# Altium PCB PCB1_r2.PcbDoc (part 3 of 3)
Units mm, origin at the board's own origin, x right, y up, seen from the top; angles counter-clockwise.
Board outline 305 x 172.5 mm, 4 copper layers (Top Layer, GND, VDD, Bottom Layer), stack 1.585 mm thick; 217 components, 137 nets, 764 pads, 352 vias.
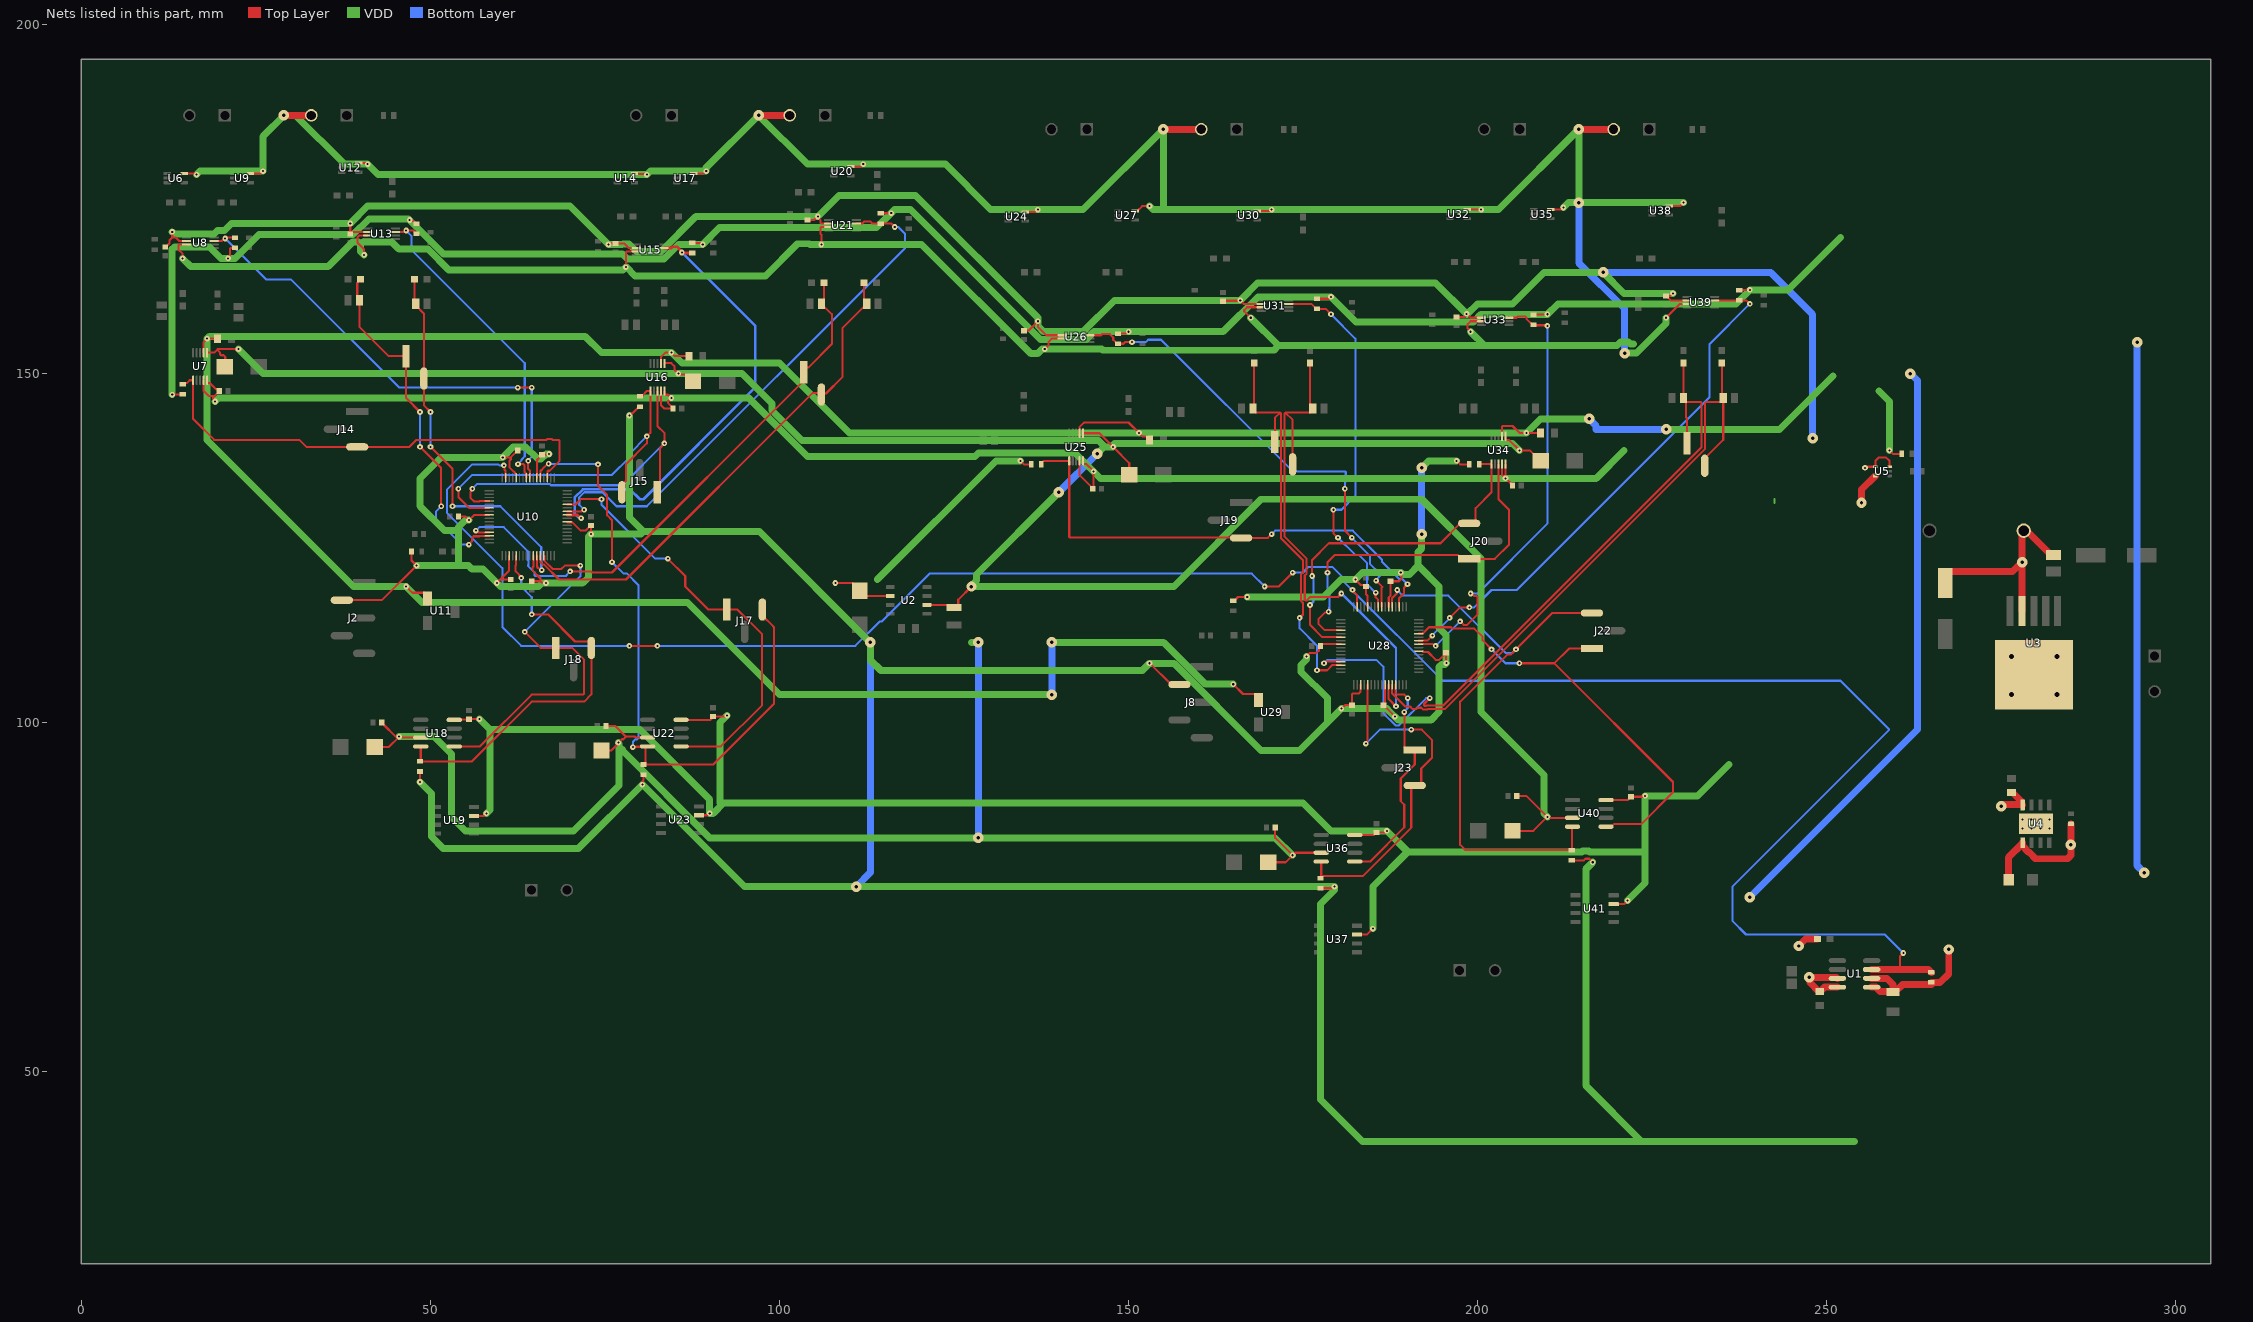
[diagram p5: the nets of this part, all layers, seen from the top]

## Via types
v1: diameter 0.8, hole 0.3, Top Layer to Bottom Layer, 291 vias
v2: diameter 1.5, hole 0.5, Top Layer to Bottom Layer, 48 vias
v3: diameter 0.5, hole 0.3, Top Layer to Bottom Layer, 8 vias
v4: diameter 1.27, hole 0.711, Top Layer to Bottom Layer, 4 vias
v5: diameter 0.83, hole 0.3, Top Layer to Bottom Layer, 1 vias

## Nets (pads, with @x,y where several pads share a name; then routed paths per layer and width w, separated by ;. In a path a pad name is that pad's centre, name@x,y a point inside that pad or via, vN(x,y) a via of type N, cw(c..) or ccw(c..) an arc to the next point about the centre after c; other vN are vias at no path point) (continued)
SCLK2_S2: J15.1 U10.4 U16.8 | length 50
  Top Layer w0.3: v1(56,133.5) 56,133.365 55.754,133.119 55.754,132.167 56.225,131.696 57.034,131.696 57.088,131.75 U10.4@58.425,131.75 ; J15.1@82.5,133 82.875,133.375 82.875,139.321 83.5,139.946 83.5,141.5 82.5,142.5 U16.8@82.5,147.5
  Bottom Layer w0.3: v1(56,133.5) 56.696,134.196 67.068,134.196 67.264,134 77.5,134 v1(83.5,140)
SCLK2_S4: J20.1 U28.4 U34.8 | length 53.2
  Top Layer w0.3: v1(178.5,121.5) 178.5,123 179.5,124 196.961,124 196.993,124.031 197.154,124.031 197.725,123.46 J20.1@198.8,123.46 202.46,123.46 204.5,125.5 204.5,130.5 203,132 U34.8@203,137.05 ; v1(178.655,115.888) 178.56,115.792 178.155,115.792 177.196,114.833 177.196,114.167 178.113,113.25 U28.4@180.425,113.25
  Bottom Layer w0.3: v1(178.5,121.5) 178.5,118.748 178.816,118.432 178.816,116.517 178.751,116.452 178.751,115.984 v1(178.655,115.888)
SCLK3_S1: J18.1 U10.29 U18.5 | length 56.3
  Top Layer w0.3: U18.5@53.4,96.595 53.405,96.595 53.5,96.5 53.595,96.595 57.095,96.595 64.5,104 71.886,104 72,104.114 72,109 70.3,110.7 J18.1@67.96,110.7 65.8,110.7 v1(63.5,113) ; U10.29@66.25,123.925 66.294,123.881 66.294,123.206 67.5,122 68.75,122 69.25,122.5 v1(71.471,122.5)
  Bottom Layer w0.3: v1(63.5,113) 71.471,120.971 v1(71.471,122.5)
SCLK3_S3: J23.1 U28.29 U36.5 | length 33.4
  Top Layer w0.3: U36.5@182.4,80.095 184.595,80.095 189.5,85 189.5,88.25 189,88.75 189,92 191,94 J23.1@191,96.08 189.925,96.08 189.55,96.455 189.55,101.45 v1(189.5,101.5) ; U28.29@188.25,105.425 188.25,104.25 188.5,104 189.5,104 v1(190,103.5)
  Bottom Layer w0.3: v1(189.5,101.5) 189.5,101.595 190,102.095 v1(190,103.5)
SCLK4_S2: J17.1 U10.44 U22.5 | length 61.8
  Top Layer w0.3: U10.44@69.575,131.25 70.775,131.25 71.579,132.054 73.92,132.054 73.973,132 v1(74.5,132) ; v1(84,123.5) 86.496,121.004 86.496,119.504 89.8,116.2 J17.1@92.46,116.2 93.955,116.2 97.5,112.655 97.5,102.5 91.595,96.595 U22.5@85.9,96.595
  Bottom Layer w0.3: v1(74.5,132) 74.5,131.187 82.187,123.5 v1(84,123.5)
SCLK4_S4: J22.1 U28.44 U40.5 | length 65.7
  Top Layer w0.3: U28.44@191.575,112.75 192.059,112.75 192.214,112.905 192.29,112.905 192.492,113.107 192.492,113.12 193.035,113.664 196.186,113.664 196.38,113.47 199.53,113.47 200.717,112.283 200.717,111.783 v1(202,110.5) ; v1(206,108.5) 211,108.5 ; J22.1@216.384,110.625 213.125,110.625 211,108.5 ; U40.5@218.4,85.095 219.2,85.095 219.605,85.5 223.5,85.5 228,90 228,91.5 211,108.5
  Bottom Layer w0.3: v1(202,110.5) 204,108.5 v1(206,108.5)
Thermal: U3.6 U4.9
  other v3: 278.05,84.85 279.35,84.85 280.65,84.85 281.95,84.85 278.05,86.15 279.35,86.15 280.65,86.15 281.95,86.15
  other v4: 276.5,104 283,104 276.5,109.5 283,109.5
VCC_1.8V: C3.1 C20.1 C29.1 C51.1 C60.1 R3.2 R4.2 U1.7 U1.8 U7.2 U11.2 U16.2 U25.2 U29.2 U34.2 | length 577.1
  Top Layer w0.3: U7.2@17.5,153 17.5,154.5 v1(18,155) C20.1@19.5,155 ; v1(46.5,119.5) 47.4,118.6 49.1,118.6 49.6,118.1 U11.2@49.6,117.75 ; U16.2@83,151.45 83,152.364 83.636,153 v1(84.5,153) 85,152.5 C29.1@87,152.5 ; U25.2@143,141.45 143,142.364 143.318,142.682 ; 143.319,142.682 143.637,143 150,143 v1(151.5,141.5) 152.025,140.975 152.65,140.975 153,140.625 C51.1@153,140.5 ; v1(165,105.5) 166.4,104.1 168.1,104.1 168.6,103.6 U29.2@168.6,103.25 ; U34.2@203.5,141 203.5,142.386 203.614,142.5 205,142.5 206,141.5 v1(207,141.5) C60.1@209,141.5 ; v1(259,139) 259.5,138.5 R4.2@260.775,138.5
  Top Layer w1: v2(246,68) 247,69 R3.2@248.7,69 ; U1.8@251.55,62.095 249.711,62.095 249.125,61.509 249.125,61.5 C3.1@249,61.5 248.875,61.5 247.596,62.779 247.596,63.404 v2(247.5,63.5) 251.415,63.5 U1.7@251.55,63.365
  VDD w1: v2(139,111.5) 155.04,111.5 161.04,105.5 v1(165,105.5) ; v2(139.004,104) 100,104 86.808,117.192 48.808,117.192 v1(46.5,119.5) 38.96,119.5 18,140.46 v1(18,155) 18.346,155.346 72.154,155.346 74.5,153 v1(84.5,153) 86,151.5 100,151.5 110,141.5 v1(151.5,141.5) v1(207,141.5) 209,143.5 v2(216,143.5) ; v2(227,142) 243.274,142 250.94,149.666 ; 257.5,147.5 259,146 v1(259,139)
  Bottom Layer w1: v2(139,111.5) 139.024,111.476 139.024,111.024 139.004,111.004 v2(139.004,104) ; v2(216,143.5) 217,142.5 217,142 v2(227,142) ; v2(239,75) 263.004,99.004 263.004,148.996 v2(262,150)
VCC_1V: C18.1 C23.1 C26.1 C35.1 C48.1 C54.1 C57.1 C66.1 U5.3 U5.4 U8.2 U13.2 U15.2 U21.2 U26.2 U31.2 U33.2 U39.2 | length 334.8
  Top Layer w0.3: C18.1@12,168.125 12.05,168.125 12.638,168.713 12.638,169.138 13,169.5 ; v1(13,170.304) 13,169.5 ; U8.2@15.05,169 14,169 13.5,169.5 13,169.5 ; v1(38.5,171.5) C23.1@38.5,170 38.55,170 38.829,170.279 U13.2@41.021,170.279 ; v1(75.5,168.5) 75.625,168.625 C26.1@76.5,168.625 77.8,168.625 78.425,168 U15.2@79.5,168 ; C35.1@104,172 105,172 v1(105.5,172.5) 105.5,172.365 105.871,171.994 105.871,171.629 106,171.5 U21.2@107.05,171.5 ; C48.1@135,156.125 135.039,156.164 135.664,156.164 v1(137,157.5) 137,156.726 138.226,155.5 U26.2@140.5,155.5 ; C54.1@163.5,160.375 163.562,160.437 165.938,160.437 v1(166,160.5) 166.5,160 U31.2@169,160 ; C57.1@197,158.125 198.125,158.125 198.435,158.435 v1(198.435,158.565) ; v1@198.5,158.5 199,158 U33.2@200.55,158 ; C66.1@227,161.125 C66.1@227.05,161.125 ; v1(228,161.5) 227.625,161.125 C66.1@227.05,161.125 ; U39.2@230,160.5 227.675,160.5 C66.1@227.05,161.125 ; v1(255.5,136.5) 255.554,136.5 255.704,136.65 U5.4@256.975,136.65 257,136.675 257,137.5 257.5,138 258.5,138 259.025,137.475 U5.3@259.025,136.65
  VDD w1: v1(13,170.304) 13.304,170 19,170 19.504,170.504 20.504,170.504 21.5,171.5 v1(38.5,171.5) 41,174 70,174 v1(75.5,168.5) 77.464,168.5 77.549,168.585 78.451,168.585 79.089,167.947 79.089,167.911 79.5,167.5 83,167.5 88,172.5 v1(105.5,172.5) 108.5,175.5 119.5,175.5 137,158 137,156.819 137.819,156 143.5,156 148,160.5 v1(166,160.5) 168.5,163 194,163 198.5,158.5 200,160 205,160 209.5,164.5 v2(218,164.5) 221,161.5 v1(228,161.5)
  Bottom Layer w1: v2(218,164.5) 242,164.5 248,158.5 v2(248,140.716)
VCC_3.3V: C5.2 C6.2 C7.1 C10.2 C11.2 C12.2 C13.2 C14.2 C15.2 C43.2 C44.2 C45.2 C46.2 C47.2 C49.2 J2.2 J8.2 R1.2 R2.2 R6.2 R12.2 R14.2 R22.2 R24.2 R30.2 R32.2 R33.2 R38.2 R42.2 R48.2 R50.2 R58.2 R60.2 R66.2 R68.2 R69.2 R74.2 U1.1 U1.2 U2.2 U4.1 U10.8 U10.19 U10.26 U10.39 U10.54 U10.60 U28.8 U28.19 U28.26 U28.39 U28.54 U28.60 | length 1206.4
  Top Layer w0.3: v1(13,147) 13.025,147.025 14.475,147.025 R12.2@14.5,147.05 ; v1(21,166.5) 21,166.635 21.304,166.939 21.304,167.886 21.418,168 R6.2@22,168 ; J2.2@37.3,117.54 43.04,117.54 v1(48,122.5) 47.275,123.225 R24.2@47.275,124.5 ; v1(47,172) 47.038,171.962 47.413,171.962 47.875,171.5 R14.2@48,171.5 ; v1(48.5,91.5) R32.2@48.5,93 ; C15.2@54,129.5 55,129.5 v1(55.5,129) 56.25,129.75 U10.8@58.425,129.75 ; v1(59.5,120) 60.069,120.569 61.25,121.75 U10.19@61.25,123.925 ; 60.137,120.5 C13.2@61.5,120.5 ; v1(60.346,138.004) 60.35,138 61.5,138 ; U10.60@62.206,135.603 62.095,135.714 62.095,135.79 61.893,135.992 61.88,135.992 61.336,136.535 61.336,137.523 61.5,137.687 61.5,138 ; C12.2@62.5,139 61.5,138 ; C14.2@64.5,120.25 65.75,120.25 ; U10.26@64.75,123.925 64.75,122.359 64.6,122.209 64.6,121.804 65.75,120.654 65.75,120.25 ; U10.54@65.25,135.075 65.25,137.625 65.725,138.1 65.725,138.15 65.95,138.375 C11.2@66,138.375 66.062,138.437 66.813,138.437 v5@66.875,138.375 ; v1(66.54,120) 66.444,120.096 65.904,120.096 65.75,120.25 ; v5@66.875,138.332 v5@66.875,138.375 ; v5(67,138.5) v5@66.875,138.375 ; U10.39@69.575,128.75 69.619,128.706 70.294,128.706 71.5,127.5 72.2,127.5 72.95,128.25 C10.2@73,128.25 v1(73,127) ; v1(78.5,144) 78.6,144 79.875,145.275 R30.2@80,145.275 ; v1(80.343,91.118) 80.35,91.125 80.35,91.606 80.5,91.756 R38.2@80.5,92.55 ; R22.2@87.5,168.725 88.721,168.725 88.946,168.5 v1(89,168.5) ; v1(108,120) 110.4,120 110.475,119.925 110.525,119.925 111.5,118.95 C7.1@111.5,118.9 ; C7.1@111.5,118.85 112.215,118.135 U2.2@115.875,118.135 ; R33.2@114.5,172.95 114.525,172.975 115.975,172.975 v1(116,173) ; v1(134.5,137.5) 135,137 R48.2@136.05,137 ; R42.2@148.5,155.725 149.671,155.725 149.946,156 v1(150,156) ; v1(153,108.5) 153.054,108.5 156.094,105.46 J8.2@157.3,105.46 ; R60.2@165,117.45 165.125,117.45 165.675,118 v1(167,118) ; v1(175.5,109.5) 176,110 176.95,110 177.282,110.332 177.282,110.782 C49.2@177.5,111 177.5,111.025 177.725,111.25 U28.8@180.425,111.25 ; R50.2@177,160.725 178.671,160.725 178.946,161 v1(179,161) ; R68.2@177.5,76.275 179.14,76.275 179.365,76.5 v1(179.5,76.5) ; v1(180.5,102) 181,102.5 C46.2@182,102.5 182,104.061 182.114,104.175 183,104.175 183.206,104.381 183.206,105.381 U28.19@183.25,105.425 ; v1(182.5,120.5) 183.282,119.718 183.782,119.718 C45.2@184,119.5 184,118.435 184.22,118.215 184.22,117.674 184.25,117.644 U28.60@184.25,116.575 ; C47.2@186.5,102.5 C47.2@186.55,102.5 ; U28.26@186.75,105.425 186.75,102.725 186.775,102.725 C47.2@186.55,102.5 ; U28.54@187.25,116.575 187.278,116.603 187.278,117.954 187.5,118.176 C44.2@187.5,120.25 188.75,120.25 189.077,120.577 189.077,121.423 v1(189,121.5) ; v1(188.145,100.855) 188.145,100.905 C47.2@186.55,102.5 ; U28.39@192.103,110.206 192.2,110.109 192.891,110.109 194,109 194.5,109 195.225,109.725 195.225,109.775 195.45,110 C43.2@195.5,110 195.5,108.548 v1(195.532,108.516) ; v1(197,137.5) 197.5,137 R66.2@198.775,137 ; R58.2@208,158.45 208.025,158.475 209.975,158.475 v1(210,158.5) ; R74.2@213.5,80.275 215.225,80.275 215.446,80.496 216.004,80.496 v1(216.5,80) ; R69.2@237.5,161.95 237.525,161.975 238.975,161.975 v1(239,162)
  Top Layer w1: U1.1@256.45,62.095 257.05,62.095 257.645,61.5 259.5,61.5 259.5,62.5 258.635,63.365 U1.2@256.45,63.365 ; C5.2@259.5,61.42 259.825,61.42 260.905,62.5 R2.2@265,62.5 ; R2.2@265,62.775 266.275,62.775 267.5,64 v2(267.5,67.5) ; C6.2@276.08,77.5 276.08,80.71 U4.1@278.095,82.725 ; U4.1@278.095,82.8 U4.1@278.095,82.725 ; R1.2@285,85.5 285,81 284.5,80.5 279.92,80.5 278.984,81.436 278.851,81.436 278.473,81.814 278.473,81.947 278.095,82.325 U4.1@278.095,82.725
  VDD w1: v1(13,147) 13,167.826 13.319,168.145 18.355,168.145 20,166.5 22,166.5 25.411,169.911 38.903,169.911 41.169,172.177 46.823,172.177 v1(47,172) ; v1@47.007,172.007 49.713,169.301 49.713,169.287 51.846,167.154 77.478,167.154 78.221,166.411 83.451,166.411 85.54,168.5 v1(89,168.5) 91.411,170.911 113.911,170.911 v1(116,173) 116.5,173.5 118.779,173.5 137.368,154.911 143.951,154.911 145.04,156 v1(150,156) 163.54,156 168.54,161 v1(179,161) 182.589,157.411 199.411,157.411 200.5,158.5 v1(210,158.5) 211.5,160 237,160 v1(239,162) 244.5,162 252,169.5 ; v1(48,122.5) 54,122.5 ; v1(48.5,91.5) 50.159,89.841 50.159,83.659 51.819,82 71.225,82 v1(80.343,91.118) 94.96,76.5 v2(111,76.5) v1(179.5,76.5) 179.5,76 177.5,74 177.5,46 183.5,40 223.5,40 ; v1(55.5,129) 55,129 54,128 54,127.5 ; v5(67,138.5) 66.58,138.5 65.832,137.751 65.381,137.751 63.632,139.5 61.842,139.5 v1(60.346,138.004) 60.084,138.004 60.08,138 51.5,138 48.5,135 48.5,131 52,127.5 54,127.5 ; v1(78.5,144) 78.5,129.375 80.5,127.375 ; 114,120.5 131,137.5 v1(134.5,137.5) ; v1(167,118) 177.92,118 180.42,120.5 v1(182.5,120.5) 183.5,121.5 v1(189,121.5) 189.274,121.226 190.226,121.226 191.5,122.5 ; v1(175.5,109.5) 175.5,109.024 174.726,108.25 174.726,107.274 178.5,103.5 178.5,100 ; v2(192,127) 192,124.932 191.5,124.432 191.5,122.5 ; v2(192,136.5) 193,137.5 v1(197,137.5) ; v1@195.5,108.5 195.319,108.319 194.819,108.319 194.5,108 194.5,101.5 193.346,100.346 188.654,100.346 187.319,101.681 187,102 v1(180.5,102) 178.5,100 ; v1(195.532,108.516) 195.5,108.548 195.5,112.58 194.496,113.584 194.496,114.416 194.5,114.42 194.5,119.5 191.5,122.5 ; v1(216.5,80) 215.5,79 215.5,48 223.5,40 ; 254,40 223.5,40 ; 54,122.5 54,127.5 ; 54,122.5 55.42,122.5 55.912,122.008 57.492,122.008 60,119.5 65.5,119.5 66,120 v1(66.54,120) 71.806,120 72.625,120.819 72.625,126.681 72.944,127 v1(73,127) 80.125,127 80.5,127.375 ; 80.5,127.375 97.125,127.375 v2(113,111.5) 113,109 114.5,107.5 152,107.5 v1(153,108.5) 156.5,108.5 169,96 174.5,96 178.5,100
  Bottom Layer w1: v2(111,76.5) 113,78.5 v2(113,111.5) ; v2(192,127) v2(192,136.5) ; v2(294.5,154.5) 294.319,154.5 294.5,154.319 294.5,79.5 v2(295.5,78.5)
  other v2: 285,82.5
VCC_5V: C4.1 C16.1 C19.2 C28.2 C36.1 C40.1 C50.2 C59.2 C67.1 C71.1 D1.1 J3.2 J5.2 J9.2 J11.2 L1.2 U3.4 U4.8 U5.5 U6.5 U7.9 U7.10 U8.3 U9.5 U12.5 U13.3 U14.5 U15.3 U16.9 U16.10 U17.5 U18.8 U19.7 U20.5 U21.3 U22.8 U23.7 U24.5 U25.9 U25.10 U26.3 U27.5 U30.5 U31.3 U32.5 U33.3 U34.9 U34.10 U35.5 U36.8 U37.7 U38.5 U39.3 U40.8 U41.7 | length 1161.9
  Top Layer w0.3: v1(14.5,166.5) 14.5,167.163 13.886,167.777 13.886,168.386 14,168.5 U8.3@15.05,168.5 ; U6.5@14.725,178.65 16.269,178.65 16.419,178.5 v1(16.5,178.5) ; U7.9@17.5,149.05 17.5,147.5 18.196,146.804 18.838,146.804 ; U7.10@18,149.05 18,148.661 18.389,148.661 19.275,147.775 19.525,147.775 19.75,147.55 19.75,147.45 19.104,146.804 18.838,146.804 ; v1(19.154,146) 19.154,146.135 18.838,146.451 18.838,146.804 ; U9.5@24.225,178.65 25.65,178.65 v1(26,179) ; U12.5@39.725,180.15 40.85,180.15 v1(41,180) ; v1(40.5,167) 40.5,167.787 39.547,168.741 39.547,169.547 39.779,169.779 U13.3@41.021,169.779 ; U18.8@53.4,100.405 53.448,100.453 55.453,100.453 C36.1@55.5,100.5 v1(57,100.5) ; U19.7@56.225,86.635 57.635,86.635 v1(58,87) ; v1(78,165.257) 78,167.386 78.114,167.5 U15.3@79.5,167.5 ; U14.5@79.225,178.65 79.3,178.575 80.925,178.575 v1(81,178.5) ; U16.9@83,147.5 83,145.5 83.5,145 C28.2@84.75,145 84.75,145.05 84.038,145.762 84.038,146.038 v1(84.5,146.5) 84.024,146.976 83.5,146.976 U16.10@83.5,147.5 ; U22.8@85.9,100.405 90.105,100.405 C40.1@90.45,100.75 ; U17.5@87.725,178.65 89.15,178.65 v1(89.5,179) ; U23.7@88.45,86.73 89.676,86.73 89.946,87 v1(90,87) ; C40.1@90.5,100.875 92.375,100.875 v1(92.5,101) ; v1(106,168.5) 106.02,168.52 106.02,169.88 105.861,170.04 105.861,170.886 105.975,171 U21.3@107.05,171 ; U20.5@110.225,179.65 111.65,179.65 v1(112,180) ; U24.5@135.225,173.15 136.65,173.15 v1(137,173.5) ; v1(138,153.5) 138.548,154.048 138.548,154.548 139,155 U26.3@140.5,155 ; U25.9@143,137.5 143,135.425 144.875,133.55 C50.2@144.875,133.5 144.962,133.587 144.962,135.962 v1(145,136) 143.943,137.057 143.5,137.057 U25.10@143.5,137.5 ; U27.5@150.95,173.3 151.25,173.3 151.95,174 v1(153,174) ; v1(167.5,158) 167.496,158 166.579,158.917 166.579,159.079 167,159.5 U31.3@169,159.5 ; U30.5@168.45,173.3 170.246,173.3 170.446,173.5 v1(170.5,173.5) ; U36.8@182.4,83.905 185.105,83.905 185.45,84.25 C67.1@185.5,84.25 186.696,84.25 186.946,84.5 v1(187,84.5) ; U37.7@182.725,69.635 184.135,69.635 v1(185,70.5) ; U32.5@198.5,173.5 v1(200.5,173.5) ; v1(199,156) 199,156.065 198.581,156.484 198.581,157.081 199,157.5 U33.3@200.55,157.5 ; U34.9@203.5,137.05 203.5,135.5 v1(204,135) ; U34.10@204,137.05 v1(204,135) ; C59.2@205,134 205,134.05 204.05,135 v1(204,135) ; U35.5@210.5,173.5 211.946,173.5 212.236,173.79 v1(212.29,173.79) ; U40.8@218.4,88.905 221.48,88.905 221.95,89.375 C71.1@222,89.375 223.821,89.375 223.946,89.5 v1(224,89.5) ; U41.7@219.5,74 221,74 v1(221.5,74.5) ; v1(227,158) 229,160 U39.3@230,160 ; U38.5@227.45,174 229,174 v1(229.5,174.5)
  Top Layer w1: v2(29,187) J3.2@32.92,187 ; v2(97,187) J5.2@101.46,187 ; v2(155,185) J9.2@160.42,185 ; v2(214.5,185) J11.2@219.5,185 ; v2(255,131.5) 255,133.375 U5.5@256.975,135.35 ; C16.1@267,120 267,121.075 267.55,121.625 276.625,121.625 v2(278,123) ; v2(275,88) 275.135,88 275.383,88.247 U4.8@277.895,88.247 ; C4.1@276.5,90 276.625,90 277.895,88.73 277.895,88.4 U4.8@278.095,88.2 ; U3.4@278,116 v2(278,123) ; L1.2@282.5,124 282.174,124 278.875,127.299 278.201,127.299 278,127.5 v2(278,123)
  VDD w0.3: 242.509,131.5 242.509,132
  VDD w1: v1(14.5,166.5) 15.654,165.346 35.346,165.346 38.822,168.822 39.678,168.822 40,168.5 ; v1(16.5,178.5) 17,179 v1(26,179) 26,184 v2(29,187) 30.657,187 37.657,180 v1(41,180) 42.5,178.5 v1(81,178.5) 81.5,179 v1(89.5,179) 89.5,179.5 v2(97,187) 104,180 v1(112,180) 123.75,180 130.25,173.5 143.5,173.5 v2(155,185) 155,173.5 ; v1(19.154,146) 19.654,146.5 v1(84.5,146.5) 95.593,146.5 103.99,138.103 127.978,138.103 128.529,138.654 142.346,138.654 v1(145,136) 146,135 191.373,135 191.377,134.996 192.623,134.996 192.627,135 v1(204,135) 217,135 221,139 ; v1(40.5,167) 40,167.5 40,168.5 ; v1(57,100.5) 58.5,99 ; v1(58,87) 58.5,87.5 58.5,99 ; v1(92.5,101) 91.5,100 91.5,88.5 92,88.5 ; v1(153,174) 153.5,173.5 155,173.5 ; v1(167.5,158) 167.5,157.996 171.496,154 ; v1(185,70.5) 185,76.5 190,81.5 ; v1(199,156) 201,154 ; v1(212.29,173.79) 213,174.5 v1(229.5,174.5) ; v2@214.5,174.5 214.502,174.502 214.502,184.998 v2(214.5,185) 203,173.5 v1(200.5,173.5) v1(170.5,173.5) 155,173.5 ; v2(221.063,152.937) 222.753,152.937 227,157.183 v1(227,158) ; v1(221.5,74.5) 224,77 224,81.5 ; 222.352,154.226 221.901,154.226 221.623,154.504 220.504,154.504 220,154 201.5,154 171.496,154 ; 236,94 231.5,89.5 v1(224,89.5) 224,81.5 ; 40,168.5 40.319,168.819 44.48,168.819 45.453,167.846 49.614,167.846 52.614,164.846 77.589,164.846 v1(78,165.257) 78.062,165.257 79.319,164 98,164 102.603,168.603 104.25,168.603 104.353,168.5 v1(106,168.5) 120.368,168.5 136.022,152.846 136.978,152.846 137.632,153.5 v1(138,153.5) 146.162,153.5 146.316,153.346 170.842,153.346 171.496,154 ; 58.5,99 80,99 90,89 v1(90,87) 90.5,87 92,88.5 ; 92,88.5 175,88.5 179,84.5 v1(187,84.5) 190,81.5 ; 190,81.5 214.964,81.5 215.049,81.585 215.951,81.585 216.036,81.5 224,81.5
  Bottom Layer w1: v2(214.504,174.5) 214.5,174.496 214.5,165.873 221.063,159.31 v2(221.063,152.937)
Vref_2.5V: C1.1 C17.1 C27.1 C33.1 C34.1 C37.1 C38.1 C42.1 C58.1 C64.1 C65.1 C68.1 C69.1 U2.6 U7.1 U16.1 U18.3 U22.3 U25.1 U34.1 U36.3 U40.3 | length 613.8
  Top Layer w0.3: U7.1@18,153 19,153 19.5,153.5 ; C17.1@20.6,150.5 20.6,152.4 20.371,152.629 20.006,152.629 19.871,152.765 19.871,152.994 19.5,153.365 19.5,153.5 ; v1(22.5,153.5) 19.5,153.5 ; C33.1@42,96.5 44,96.5 v1(45.5,98) ; C34.1@43,100 43,99.95 43.225,99.725 43.275,99.725 45,98 v1(45.5,98) ; U18.3@48.6,97.865 45.635,97.865 v1(45.5,98) ; C37.1@74.5,96 75.914,96 76.924,97.01 v1(76.924,97.132) ; C38.1@75.125,99.5 76.5,99.5 78,98 ; v1@77.028,97.028 77.028,97.236 77.406,97.614 77.614,97.614 78,98 ; U22.3@81.1,97.865 79.406,97.865 79.245,98.026 78.489,98.026 78.463,98 78,98 ; U16.1@83.5,151.45 83.5,151.5 84.5,151.5 84.952,151.048 84.952,150.548 v1(85.5,150) 85.635,150 85.76,149.875 86.627,149.875 C27.1@88.002,148.5 ; U2.6@121.125,116.865 124.035,116.865 124.4,116.5 125.25,116.5 125.6,116.85 125.6,117.6 v2(127.5,119.5) ; U25.1@143.5,141.45 145.831,141.45 v1(147.781,139.5) ; v1@147.64,139.36 147.921,139.36 150.1,137.181 C42.1@150.1,135.5 ; C64.1@170,80 172.5,80 v1(173.5,81) ; C65.1@171,85 171,83.5 v1(173.5,81) ; U36.3@177.6,81.365 173.865,81.365 v1(173.5,81) ; U34.1@204,141 204,140.475 204.525,140.475 v1(206,139) 207.5,139 209,137.5 C58.1@209.05,137.5 ; C68.1@205,84.5 208,84.5 v1(210,86.5) ; C69.1@205.625,89.5 207,89.5 v1(210,86.5) ; U40.3@213.6,86.365 210.189,86.365 210.054,86.5 v1(210,86.5)
  VDD w1: v1(22.5,153.5) 26,150 v1(85.5,150) 94.632,150 98.927,145.705 98.927,144.706 103.222,140.411 145.716,140.411 146.627,139.5 ; v1(45.5,98) 50.5,98 53,95.5 53,86.5 55,84.5 70.5,84.5 77,91 77,96 ; v1(76.924,97.132) 76.924,97.076 77,97 77,96.132 ; 77.316,96.316 77.5,96.132 77.5,96 90,83.5 v2(128.5,83.5) 171,83.5 v1(173.5,81) ; 127.5,111.5 v2(128.5,111.5) ; v2(140,133.004) 128.239,121.243 128.239,120.374 127.5,119.635 v2(127.5,119.5) 156.5,119.5 169,132 192,132 200.5,123.5 200.5,101.5 209.5,92.5 209.5,87 v1(210,86.5) ; v2(145.5,138.5) 146.5,139.5 146.627,139.5 ; v1@147.5,139.5 148,140 205,140 v1(206,139) ; v1(147.781,139.5) 146.627,139.5
  Bottom Layer w1: v2(128.5,83.5) v2(128.5,111.5) ; v2(140,133.004) 140.002,133.004 v2(145.5,138.5) v2(145.5,138.5)
Vshunt_S1_N: C24.2 J16.2 R20.2 U10.27 | length 55.7
  Top Layer w0.3: R20.2@47.7,163.5 47.7,160.18 C24.2@47.88,160 47.88,159.775 49.04,158.615 49.04,145.46 v1(50,144.5) ; v1(50,139.5) 53.146,136.354 53.146,132.167 53.15,132.163 v1(53.15,131) ; U10.27@65.25,123.925 65.25,122.304 65.364,122.19 65.449,122.19 65.803,121.836 v1(65.938,121.836)
  Bottom Layer w0.3: v1(50,139.5) v1(50,144.5) ; v1(53.15,131) 60,131 65.87,125.13 65.87,121.904 v1(65.938,121.836)
Vshunt_S1_P: C25.2 J16.1 R21.2 U10.14 | length 51.3
  Top Layer w0.3: R21.2@40,163.5 39.95,163.5 39.65,163.2 39.65,163.15 39.5,163 39.5,160.81 C25.2@39.81,160.5 39.81,156.69 44,152.5 J16.1@46.5,152.5 46.5,146.5 v1(48.5,144.5) ; v1(48.5,139.5) 51.5,136.5 51.5,131.042 v1(51.542,131) ; v1(55.5,125.5) 55.5,125.558 55.923,125.981 55.923,126.423 56.196,126.696 57.019,126.696 57.073,126.75 U10.14@58.425,126.75
  Bottom Layer w0.3: v1(48.5,139.5) v1(48.5,144.5) ; v1(51.542,131) 50.762,130.22 50.762,129.233 54.495,125.5 v1(55.5,125.5)
Vshunt_S2_N: C39.2 J21.2 R39.2 U10.28 | length 72.5
  Top Layer w0.3: U10.28@65.75,123.925 65.75,123.008 66.118,122.64 66.271,122.64 68.411,120.5 78,120.5 104.736,147.236 105.764,147.236 J21.2@106,147 106.15,147.15 106.65,147.15 109,149.5 109,156.5 C39.2@112.5,160 112.5,160.225 112.1,160.625 R39.2@112.1,163
Vshunt_S2_P: C41.2 J21.1 R41.2 U10.13 | length 82
  Top Layer w0.3: v1(56.5,127.5) 56.554,127.5 56.804,127.25 U10.13@58.425,127.25 ; v1(70.005,121.66) 70.011,121.654 72.991,121.654 73.145,121.5 76,121.5 103.46,148.96 J21.1@103.46,150.2 103.46,150.475 103.835,150.85 104.11,150.85 107.5,154.24 107.5,158.5 C41.2@106,160 106,160.225 106.4,160.625 R41.2@106.4,163
  Bottom Layer w0.3: v1(56.5,127.5) 57,128 60.5,128 64,124.5 64,123.227 64.06,123.167 64.06,122.625 64,122.565 64,122.425 64.872,121.553 64.872,121.125 64.986,121.011 69.405,121.011 69.519,121.125 69.519,121.173 70.005,121.659 v1(70.005,121.66)
Vshunt_S3_N: C55.2 J24.2 R56.2 U28.27 | length 75.8
  Top Layer w0.3: J24.2@173.5,137 173.5,143.384 172.469,144.415 ; R56.2@176,151.5 176,145.699 176.114,145.585 176.14,145.585 176.5,145.225 C55.2@176.5,145 ; C55.2@176.38,145 176.38,144.775 176.02,144.415 172.469,144.415 ; v1(180.5,118.5) 180,118 176.017,118 175.523,117.506 175.362,117.506 175.248,117.62 175.248,121.081 175.52,121.353 175.52,123.48 172.355,126.645 172.355,144.301 172.469,144.415 ; U28.27@187.25,105.425 187.25,103.382 v1(188.316,102.316)
  Bottom Layer w0.3: v1(180.5,118.5) 188.316,110.684 v1(188.316,102.316)
Vshunt_S3_P: C56.2 J24.1 R57.2 U28.14 | length 58.9
  Top Layer w0.3: R57.2@168,151.5 168,145.19 C56.2@167.81,145 167.81,144.775 168.17,144.415 171.721,144.415 ; J24.1@170.96,140.2 170.96,143.654 171.721,144.415 ; v1(174.5,115) 174.994,115.494 174.994,117.138 174.728,117.404 174.728,121.296 175,121.568 175,123.265 171.835,126.43 171.835,144.301 171.721,144.415 ; v1(177,107.5) 178.45,107.5 179.2,108.25 U28.14@180.425,108.25
  Bottom Layer w0.3: v1(174.5,115) 174.5,113.5 177,111 v1(177,107.5)
Vshunt_S4_N: C70.2 J25.2 R75.2 U28.28 | length 87.9
  Top Layer w0.3: U28.28@187.75,105.425 187.75,104.2 189.646,102.304 190.327,102.304 190.694,101.937 191.223,101.937 191.423,102.137 191.952,102.137 192.218,101.871 192.81,101.871 192.876,101.937 195.31,101.937 232.605,139.233 232.605,145.801 232.719,145.915 234.83,145.915 C70.2@235.19,146.275 ; J25.2@232.54,136.8 232.54,137.875 235.19,140.525 C70.2@235.19,146.275 ; R75.2@235,151.5 235,146.69 C70.2@235.19,146.5 C70.2@235.19,146.275
Vshunt_S4_P: C72.2 J25.1 R77.2 U28.13 | length 104.1
  Top Layer w0.3: v1(178,108.5) 178.135,108.5 178.385,108.75 U28.13@180.425,108.75 ; v1(193.154,103.5) 192.32,102.666 192.32,102.505 192.434,102.391 192.595,102.391 192.661,102.457 195.094,102.457 232.085,139.448 232.085,145.801 231.971,145.915 C72.2@229.86,145.915 ; R77.2@229.5,151.5 C72.2@229.5,146.5 229.5,146.275 C72.2@229.86,145.915 ; J25.1@230,140 230,143.612 229.86,143.752 C72.2@229.86,145.915
  Bottom Layer w0.3: v1(178,108.5) 178.5,109 185.5,109 186.5,108 186.5,101.363 188.282,99.581 188.718,99.581 192.637,103.5 v1(193.154,103.5)
~PD1_S1: R6.1 U8.7 U10.56 | length 69.2
  Top Layer w0.3: U8.7@19,169 20.097,169 20.45,169.353 v1(20.586,169.353) ; v1@20.575,169.5 R6.1@22,169.5 ; v1(62.5,148) v1(64.5,148) ; v1(64,137.5) 63.946,137.446 63.946,136.407 64.25,136.103 U10.56@64.25,135.075
  Bottom Layer w0.3: v1(20.586,169.353) 26.438,163.5 30,163.5 45.5,148 v1(62.5,148) ; v1(64,137.5) 64,137.595 64.5,138.095 v1(64.5,148)
~PD1_S2: R22.1 U10.41 U15.7 | length 67.6
  Top Layer w0.381: U10.41@69.575,129.75 71.068,129.75 71.514,129.304 v1(71.582,129.304) ; U15.7@83.45,168 84.518,168 84.712,168.194 85.306,168.194 85.605,167.895 85.605,167.872 86.018,167.459 v1(86.018,167.346) ; v1@86,167.5 86,167.486 86.211,167.275 R22.1@87.5,167.275
  Bottom Layer w0.381: v1(71.582,129.304) 71.469,129.304 71.331,129.442 71.15,129.442 70.655,129.936 70.655,132.229 71.856,133.429 78.571,133.429 80,132 80.5,132 96.5,148 96.5,156.864 v1(86.018,167.346)
~PD1_S3: R42.1 U26.7 U28.56 | length 67.6
  Top Layer w0.3: U26.7@144.45,155.5 146.079,155.5 146.229,155.65 147.333,155.65 147.804,155.179 147.804,154.846 148.375,154.275 149.275,154.275 149.5,154.5 v1(150.5,154.5) ; v1(181,133.5) 181,127.5 v1(182,126.5) ; v1(185.473,120.346) 186.361,119.458 186.25,119.347 U28.56@186.25,116.575
  Bottom Layer w0.3: v1(150.5,154.5) 152.472,154.5 152.818,154.846 154.654,154.846 173.5,136 181,136 181.114,135.886 181.114,134.529 181,134.415 v1(181,133.5) ; v1(182,126.5) 184.576,123.924 184.576,122.786 186,121.363 186,121 185.473,120.473 v1(185.473,120.346)
~PD1_S4: R58.1 U28.41 U33.7 | length 64.2
  Top Layer w0.3: U28.41@191.575,111.25 193.615,111.25 193.865,111 v1(194,111) ; v1(197.5,114.5) 198,114 198.5,114 200,115.5 200,117.996 199.867,118.129 199.506,118.129 199.135,118.5 v1(199,118.5) ; U33.7@204.5,158 205.571,158 205.725,158.154 206.846,158.154 207,158 207,157.875 207.875,157 R58.1@208,157 208.077,156.923 209.923,156.923 v1(210,156.846)
  Bottom Layer w0.3: v1(194,111) v1(197.5,114.5) ; v1(199,118.5) 200,118.5 210,128.5 v1(210,156.846)
~PD2_S1: R14.1 U10.57 U13.7 | length 47.2
  Top Layer w0.3: U13.7@44.971,170.279 46.143,170.279 46.365,170.5 v1(46.5,170.5) 47.55,170.5 47.7,170.35 47.7,170.225 47.874,170.051 R14.1@47.999,170.051 ; v1(62.529,137.029) 63.297,137.029 63.44,136.886 63.44,135.981 63.595,135.826 63.595,135.714 63.75,135.559 U10.57@63.75,135.075
  Bottom Layer w0.3: v1(46.5,170.5) 47.304,169.696 47.304,167.696 63.5,151.5 63.5,138.137 63.063,137.7 63.063,137.563 v1(62.529,137.029)
~PD2_S2: R33.1 U10.42 U21.7 | length 77.6
  Top Layer w0.3: U10.42@69.575,130.25 71.615,130.25 71.865,130.5 v1(72,130.5) ; U21.7@111,171.5 111.863,171.5 112.167,171.804 112.988,171.804 113.292,171.5 R33.1@114.5,171.5 115.996,171.5 v1(116.5,170.996)
  Bottom Layer w0.3: v1(72,130.5) 71.305,131.195 71.305,132.271 72.034,133 74.637,133 76.637,131 81,131 118,168 118,170 117.004,170.996 v1(116.5,170.996)
~PD2_S3: R50.1 U28.57 U31.7 | length 55
  Top Layer w0.3: U31.7@172.95,160 176.15,160 176.875,159.275 R50.1@177,159.275 178.225,159.275 v1(179,158.5) ; v1(179.346,130.5) 179.346,127.154 v1(180,126.5) ; v1(185.413,118.63) 185.404,118.621 185.404,117.959 185.75,117.614 U28.57@185.75,116.575
  Bottom Layer w0.3: v1(179,158.5) 182.5,155 182.5,132.5 180.5,130.5 v1(179.346,130.5) ; v1(180,126.5) 182.471,124.029 182.971,124.029 184.188,122.812 184.188,119.812 185.37,118.63 v1(185.413,118.63)
~PD2_S4: R69.1 U28.42 U39.7 | length 77.2
  Top Layer w0.3: U28.42@191.575,111.75 192.809,111.75 v1(193.529,112.471) ; v1(196,115) 197.513,116.513 v1(198.815,116.513) ; U39.7@233.95,160.5 R69.1@237.5,160.5 238.5,160.5 v1(239,160)
  Bottom Layer w0.3: v1(193.529,112.471) 193.529,112.5 196,114.971 v1(196,115) ; v1(198.815,116.513) 198.853,116.475 199.025,116.475 199.033,116.467 199.467,116.467 202,119 205.632,119 233.22,146.588 233.22,154.22 v1(239,160)
~Pwrctrl_1.8V: R2.1 U1.3 U10.63 U28.63 | length 327.7
  Top Layer w0.3: v1(60.501,136.85) 60.596,136.755 60.596,136.215 60.75,136.061 U10.63@60.75,135.075 ; v1(78.5,111) v1(82.5,111) ; v1(169.5,119.5) 171.5,119.5 v1(173.5,121.5) ; v1(182.086,119.021) 182.086,118.914 182.75,118.25 U28.63@182.75,116.575 ; 260.52,64.635 260.52,66.52 v1(261,67)
  Top Layer w1: U1.3@256.45,64.635 260.52,64.635 264.59,64.635 R2.1@265,64.225
  Bottom Layer w0.3: v1(60.501,136.85) 59.861,136.85 59.711,137 56,137 52.346,133.346 52.346,130.079 60.304,122.121 60.304,113.696 63,111 v1(78.5,111) ; v1(82.5,111) 110.868,111 114.361,114.494 114.631,114.494 121.483,121.346 167.654,121.346 v1(169.5,119.5) ; v1(173.5,121.5) 174.984,121.5 175.788,122.304 179.196,122.304 180.55,120.95 180.55,120.45 181.979,119.021 v1(182.086,119.021) ; v1@182,118.996 194.996,106 252,106 258.919,99.081 258.919,98.919 236.5,76.5 236.5,71.614 238.46,69.654 258.346,69.654 v1(261,67)
~SS1_S1: J14.3 R12.1 U7.6 U10.51 | length 68.1
  Top Layer w0.3: R12.1@14.5,148.5 14.625,148.625 15.075,148.625 15.5,149.05 U7.6@16,149.05 16,143.5 19,140.5 31.222,140.5 32.222,139.5 J14.3@39.5,139.5 47,139.5 48,140.5 66.581,140.5 66.7,140.619 67.366,140.619 67.484,140.5 68.386,140.5 68.5,140.386 68.5,137.528 67.056,136.085 66.864,136.085 66.75,135.971 U10.51@66.75,135.075
~SS1_S3: J19.3 R48.1 U25.6 U28.51 | length 71.3
  Top Layer w0.3: R48.1@137.5,137 137.5,137.125 137.875,137.5 U25.6@141.5,137.5 141.5,126.614 141.614,126.5 165.085,126.5 165.045,126.46 169.96,126.46 v1(170.5,127) ; U28.51@188.75,116.575 188.75,117.8 189.469,118.519 189.469,119.319 189.964,119.814 v1(189.964,119.834)
  Bottom Layer w0.3: v1(170.5,127) 171,127.5 182.137,127.5 186.304,123.333 186.304,123.059 188.815,120.548 189.25,120.548 v1(189.964,119.834)
~SS2_S2: J15.3 R30.1 U10.6 U16.6 | length 54.7
  Top Layer w0.3: v1(54,133.5) 54.002,133.498 54.002,132.311 55.563,130.75 U10.6@58.425,130.75 ; J15.3@77.42,133 77.42,134.075 78,134.655 78,137 81,140 v1(81,141) 81.5,141.5 U16.6@81.5,147.5 81,147.5 80.4,146.9 80.175,146.9 R30.1@80,146.725
  Bottom Layer w0.3: v1(54,133.5) 56,135.5 76,135.5 78.452,137.952 78.452,138.452 v1(81,141)
~SS2_S4: J20.3 R66.1 U28.6 U34.6 | length 51.4
  Top Layer w0.3: v1(176,116.846) 176,114 177.75,112.25 U28.6@180.425,112.25 ; v1(176.304,121) 176.304,123.304 178.696,125.696 194.696,125.696 197.54,128.54 J20.3@198.8,128.54 199.379,128.54 199.725,128.886 199.725,130.725 202,133 U34.6@202,137.05 200.275,137.05 R66.1@200.225,137
  Bottom Layer w0.3: v1(176,116.846) 176.5,117.346 176.5,120.669 176.304,120.865 v1(176.304,121)
~SS3_S1: J18.3 R32.1 U10.21 U18.4 | length 57.7
  Top Layer w0.3: U18.4@48.6,96.595 48.6,94.55 R32.1@48.5,94.45 55.95,94.45 64.5,103 72,103 73.04,104.04 J18.3@73.04,110.7 73.04,111.279 72.694,111.625 70.708,111.625 66.833,115.5 v1(64.5,115.5) ; U10.21@62.25,123.925 62.25,122.559 62.196,122.505 62.196,121.667 63,120.863 v1(63,120.738)
  Bottom Layer w0.3: v1(63,120.738) 63,119.897 62.904,119.801 62.904,119.579 64.5,117.983 v1(64.5,115.5)
~SS3_S3: J23.3 R68.1 U28.21 U36.4 | length 52
  Top Layer w0.3: R68.1@177.5,77.725 177.625,77.725 177.9,78 183.55,78 190.5,84.95 190.5,90.654 190.846,91 J23.3@191,91 191.579,91 191.925,91.346 191.925,93.422 193.5,94.997 193.5,97.5 192,99 v1(190.5,99) ; R68.1@177.6,77.825 U36.4@177.6,80.095 ; v1(184,97) 184,97.135 184.25,97.385 U28.21@184.25,105.425
  Bottom Layer w0.3: v1(184,97) 186,99 v1(190.5,99)
~SS4_S2: J17.3 R38.1 U10.53 U22.4 | length 94.2
  Top Layer w0.3: U10.53@65.75,135.075 65.75,136.05 66.221,136.521 66.787,137.088 v1(66.923,137.088) ; v1(74,137) 74,133.932 75.304,132.628 75.304,129.696 76,129 v1(76,123) ; v1(79,96.5) 79.048,96.548 80.753,96.548 U22.4@80.8,96.595 ; R38.1@80.5,94 R38.1@80.625,94 ; U22.4@80.8,96.456 80.8,94.175 R38.1@80.625,94 ; J17.3@97.54,116.2 97.54,115.346 99.087,113.8 99.201,113.686 99.201,102.701 90.5,94 R38.1@80.625,94
  Bottom Layer w0.3: v1(66.923,137.088) 66.973,137.038 73.962,137.038 v1(74,137) ; v1(76,123) 77.625,121.375 78.125,121.375 79.804,119.696 79.804,97.804 79.593,97.593 79.328,97.593 79,97.265 v1(79,96.5)
~SS4_S4: J22.3 R74.1 U28.53 U40.4 | length 88
  Top Layer w0.3: U28.53@187.75,116.575 187.75,117.8 188.462,118.512 188.462,118.962 v1(188.5,119) ; U40.4@213.6,85.095 213.5,84.995 R74.1@213.5,81.725 198.275,81.725 197.5,82.5 197.5,103 204.235,109.735 204.735,109.735 v1(205.5,110.5) 210.705,115.705 J22.3@216.384,115.705
  Bottom Layer w0.3: v1(188.5,119) 189.304,118.196 195.804,118.196 204,110 205,110 v1(205.5,110.5)
pads on no net: U2.1 U2.3 U2.7 U2.8 U4.2 U4.3 U4.4 U4.6 U10.2 U10.3 U10.10 U10.11 U10.12 U10.17 U10.18 U10.23 U10.24 U10.30 U10.31 U10.32 U10.33 U10.36 U10.37 U10.38 U10.45 U10.46 U10.47 U10.48 U10.52 U10.58 U10.61 U10.62 U10.64 U19.1 U19.5 U19.8 U23.1 U23.5 U23.8 U28.2 U28.3 U28.10 U28.11 U28.12 U28.17 U28.18 U28.23 U28.24 U28.30 U28.31 U28.32 U28.33 U28.36 U28.37 U28.38 U28.45 U28.46 U28.47 U28.48 U28.52 U28.58 U28.61 U28.62 U28.64 U37.1 U37.5 U37.8 U41.1 U41.5 U41.8

## Polygon pours and split planes (outlines as drawn)
VCC_3.3V on VDD "VCC_3.3V_L03_P005" (solid, pour order 5): 106,121.5 106,110.5 116,110.5 116,121.5
VCC_3.3V on VDD "VCC_3.3V_L03_P003" (solid, pour order 3): 252.5,84 301.5,84 301.5,30 252.5,30
VCC_5V on VDD "VCC_5V_L03_P002" (solid, pour order 2): 233.5,132.5 299.5,132.5 301.5,130.5 301.5,86.5 233.5,86.5
Vref_2.5V on VDD "VREF_2.5V_L03_P004" (solid, pour order 4): 121,121.5 121,110.5 130.5,110.5 130.5,121.5
VCC_1.8V on VDD "VCC_1.8V_L03_P007" (solid, pour order 7): 228.5,78 250,78 250,42 249.5,42.5 228.5,42.5
VCC_1V on VDD "VCC_1V_L03_P017" (solid, pour order 17): 213.5,168.5 220,168.5 220,163 213.5,163
VCC_1V on VDD "VCC_1V_L03_P009" (solid, pour order 9): 246.75,142 256.25,142 256.25,134.5 246.75,134.5
VCC_5V on VDD "VCC_5V_L03_P013" (solid, pour order 13): 225,132.5 233.5,132.5 233.5,125 233,125.5 219,125.5 219,155 225,155
VCC_3.3V on VDD "VCC_3.3V_L03_P011" (solid, pour order 11): 271.25,182 251,182 251,166.5 271.25,166.5
VCC_3.3V on VDD "VCC_3.3V_L03_P006" (solid, pour order 6): 268.5,182 303.5,182 303.5,138.5 268.5,138.5
VCC_1.8V on VDD "VCC_1.8V_L03_P008" (solid, pour order 8): 250.5,163.5 265.5,163.5 265.5,146 250.5,146
Thermal on Bottom Layer "THERMAL_L04_P018" (solid, pour order 18): 287.5,112.5 287.5,71.5 287.5,27 266,27 266,112.5
GND on GND "GND_L02_P014" (solid, pour order 14): 3,194.5 2.5,194 2.5,25 301,25 303,27 302,28 302,192.5

## Silkscreen, mask and mechanical layers (free items; w line width, h text height)
Top Overlay:
  text "S1+ S1-" at 17.254,192.254 h1.52
  text "V+ V-" at 35.254,192.254 h1.52
  text "S3+ S3-" at 137.254,192.254 h1.52
  text "V+ V-" at 159.254,192.254 h1.52
  text "S4+ S4-" at 199.254,192.254 h1.52
  text "V+ V-" at 217.754,192.254 h1.52
  text "S2+ S2-" at 83.254,191.754 h1.52
  text "V+ V-" at 104.754,191.754 h1.52
  text "Shunt_1" at 53.492,146.254 h1.52 r90
  text "Shunt_2" at 111.492,143.754 h1.52 r90
  text "SPI2_S2" at 86.008,139.246 h1.52 r270
  text "SPI1_S1" at 33.254,135.008 h1.52
  text "Shunt_4" at 237.992,133.754 h1.52 r90
  text "Shunt_3" at 177.992,132.754 h1.52 r90
  text "SPI1_S3" at 160.254,122.008 h1.52
  text "SPI2_S4" at 195.754,119.508 h1.52
  text "V+V-" at 301.754,111.246 h1.52 r270
  text "Pickit" at 32.746,110.254 h1.52 r90
  text "SPI4_S2" at 90.254,108.008 h1.52
  text "SPI4_S4" at 213.754,106.508 h1.52
  text "SPI3_S1" at 65.754,102.508 h1.52
  text "Pickit" at 153.746,98.254 h1.52 r90
  text "SPI3_S3" at 185.254,86.508 h1.52
  text "O1 O2" at 63.754,69.254 h1.52
  text "O3 O4" at 195.754,57.254 h1.52